# Altium PCB Pannel3.5x3.PcbDoc (part 3 of 4)
Units mil, origin at the board's own origin, x right, y up, seen from the top; angles counter-clockwise.
Board outline 3543.31 x 2771.65 mil, 4 copper layers (SIGNAL, GROUND, PWR, SIGNAL (Bottom)), stack 61.627 mil thick; 248 components, 189 nets, 921 pads, 651 vias.
Unrouted connection lines stored in the file: 1.
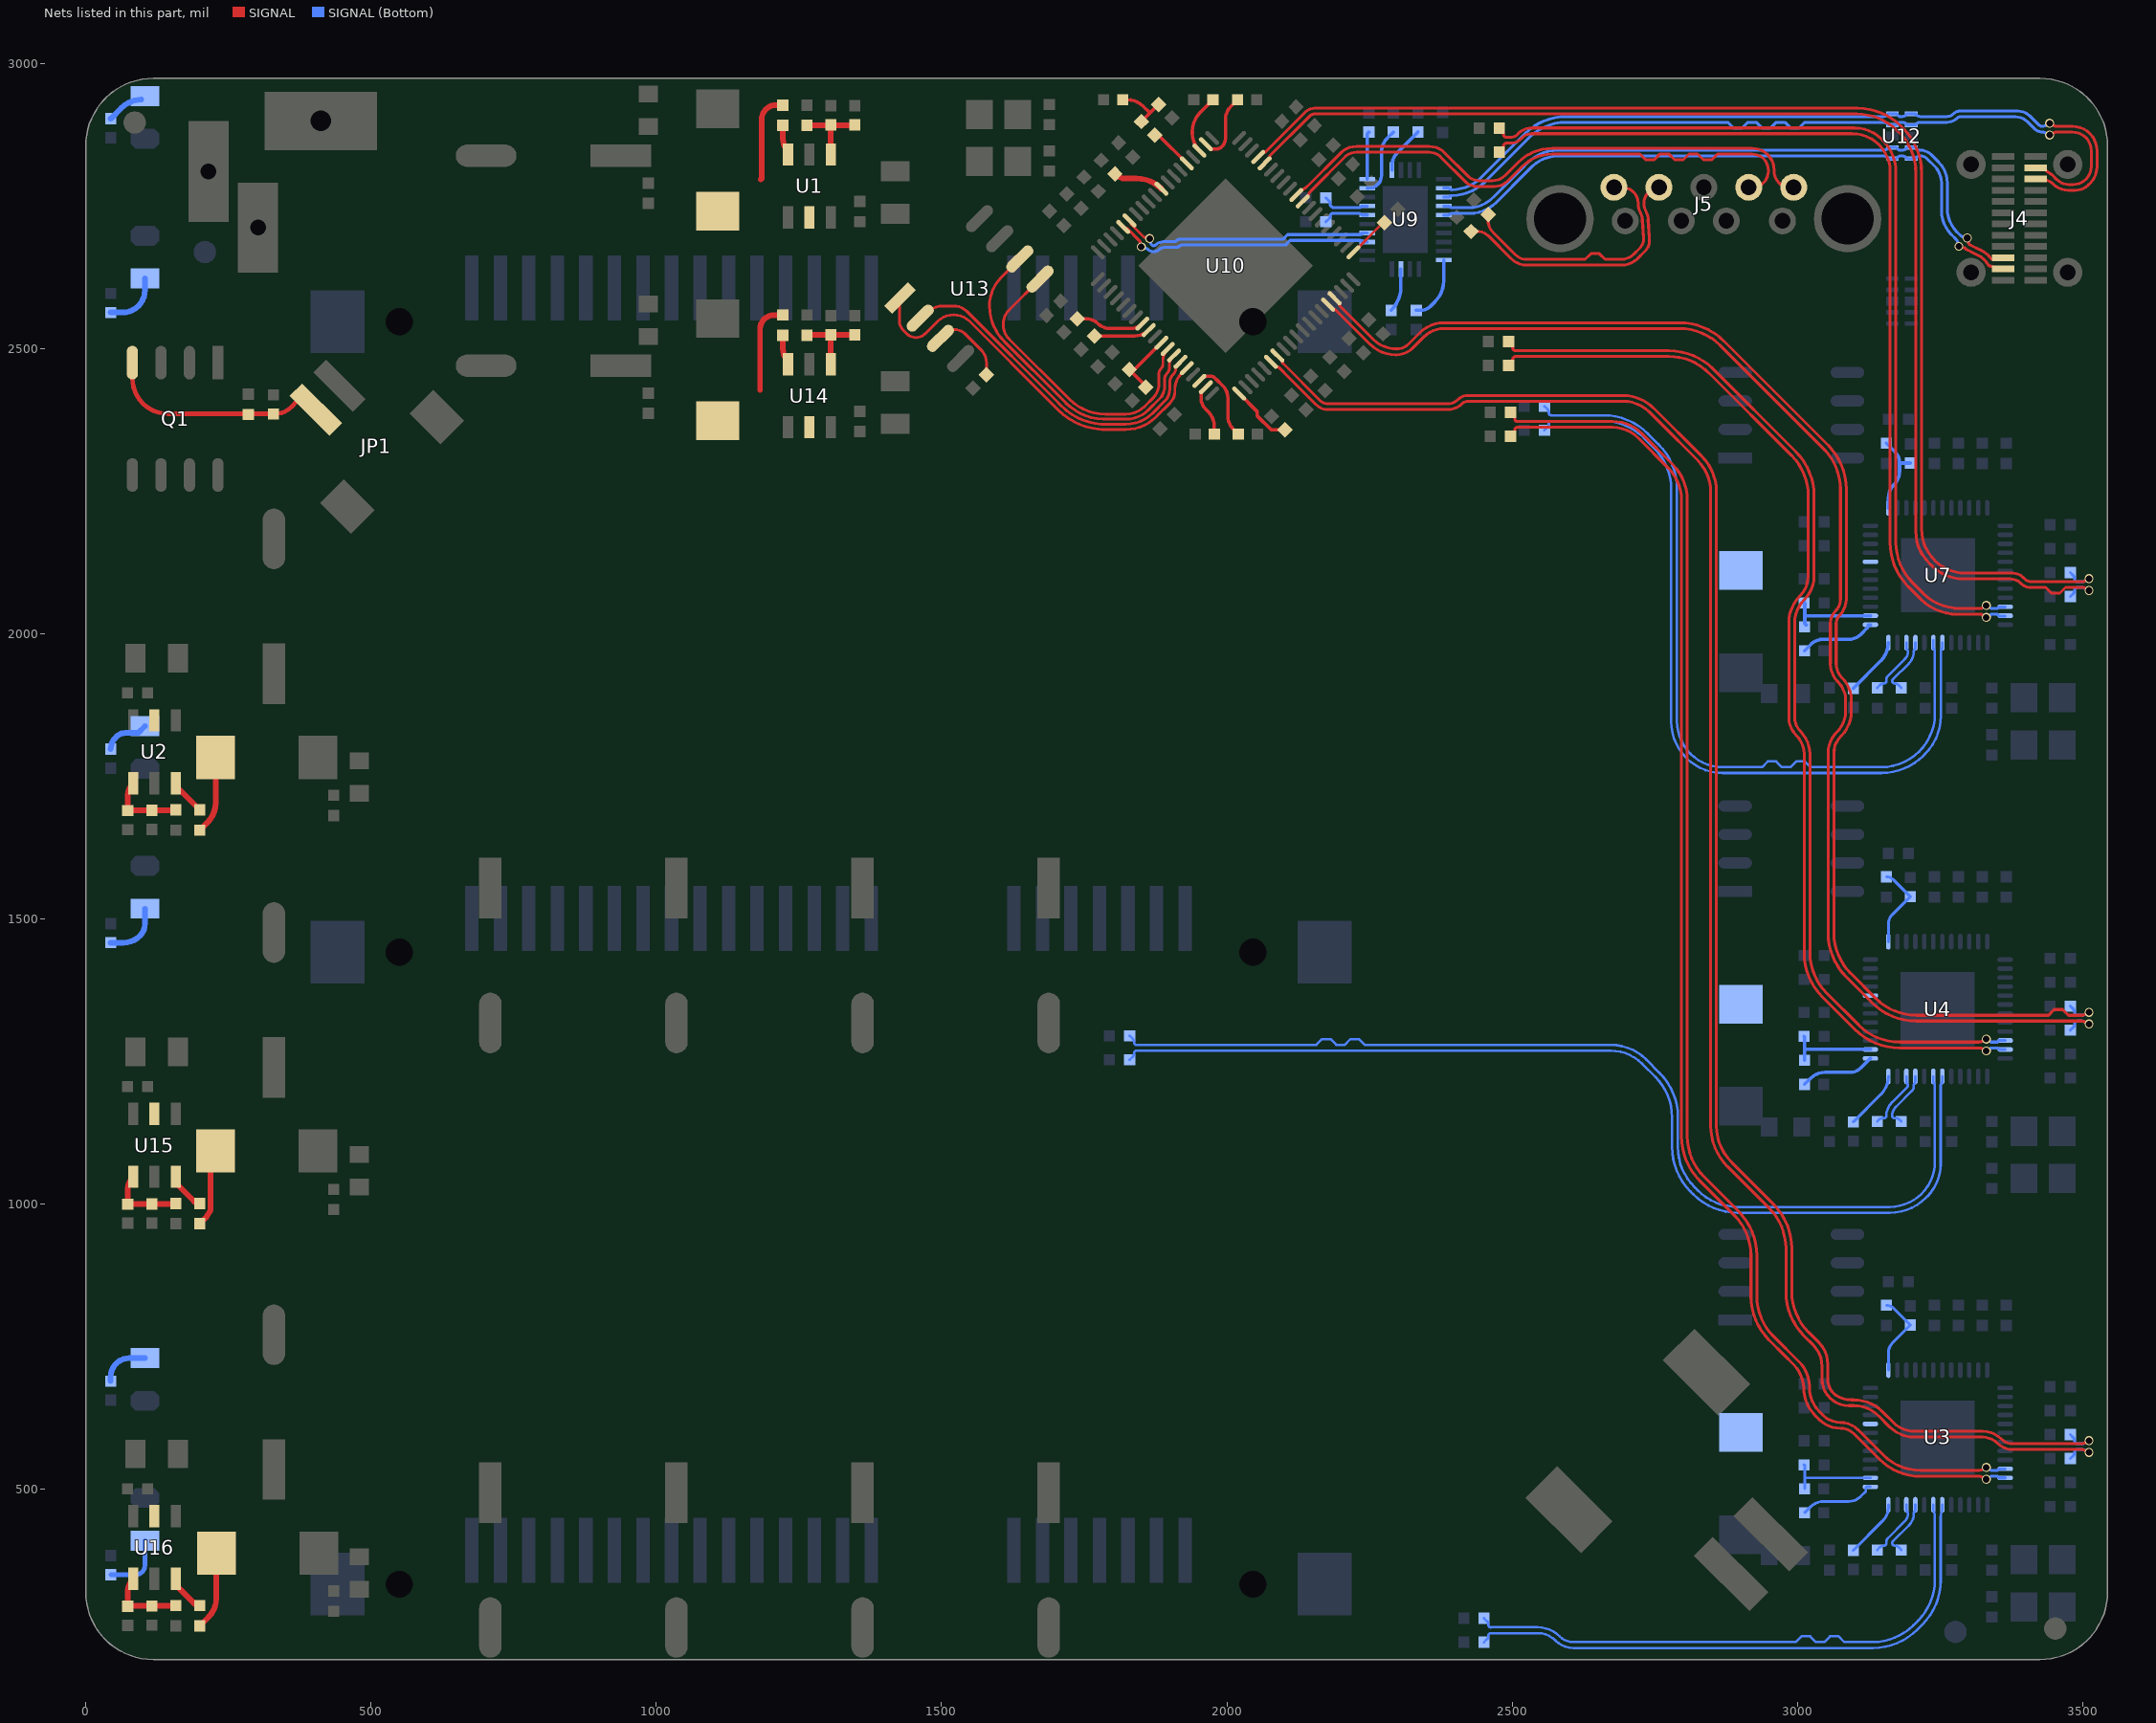
[diagram p5: the nets of this part, all layers, seen from the top]

## Via types
v1: diameter 15.75, hole 11.81, SIGNAL to SIGNAL (Bottom), tented both sides, 651 vias

## Nets (pads, with @x,y where several pads share a name; then routed paths per layer and width w, separated by ;. In a path a pad name is that pad's centre, name@x,y a point inside that pad or via, vN(x,y) a via of type N, cw(c..) or ccw(c..) an arc to the next point about the centre after c; other vN are vias at no path point) (continued)
IN_SSTX1_N: J4.A3 U9.2 U12.1 U12.10 | length 1402.5
  SIGNAL w5.1: J4.A3@3417.35,2796.9 ccw(c3420.44,2799.99) 3420.44,2795.62 3430.45,2795.62 cw(c3430.45,2770.67) 3448.09,2788.31 ccw(c3474.51,2814.73) 3474.51,2777.37 3487.85,2777.37 ccw(c3487.85,2808.7) 3509.62,2786.17 ccw(c3487.85,2808.7) 3510.01,2786.55 3513.03,2789.57 ccw(c3483.88,2818.71) 3525.1,2818.71 3525.1,2846.47 ccw(c3482.32,2846.47) 3512.57,2876.71 3512.39,2876.9 ccw(c3482.14,2846.65) 3482.14,2889.42 3453.97,2889.42 cw(c3453.97,2898.51) 3447.54,2892.09 3446.92,2892.71 ccw(c3442,2887.79) v1(3442,2894.75)
  SIGNAL (Bottom) w5.1: U9.2@2379.93,2781.11 2387.78,2781.11 cw(c2387.78,2776.3) U9.2@2391.17,2779.71 ; U9.2@2391.19,2779.69 ccw(c2394.59,2783.1) 2394.59,2778.29 ccw(c2394.59,2850) 2445.26,2799.26 ; 2445.29,2799.29 2522.53,2876.53 cw(c2595.08,2803.98) 2522.61,2876.61 cw(c2595.08,2803.98) 2595.08,2906.58 3150.78,2906.58 ccw(c3150.78,2916.78) 3157.99,2909.56 3157.99,2909.98 3158.68,2910.68 cw(c3160.36,2909) 3160.36,2911.37 U12.10@3166.56,2911.37 3171.79,2911.37 cw(c3171.79,2906.63) 3175.13,2909.99 3175.14,2909.57 3176.63,2908.07 ccw(c3180.24,2911.68) 3180.24,2906.58 3183.65,2906.58 ccw(c3183.65,2916.78) 3190.86,2909.56 3190.86,2909.98 3191.56,2910.68 cw(c3193.23,2909) 3193.23,2911.37 U12.1@3199.44,2911.37 3205.64,2911.37 cw(c3205.64,2909) 3207.32,2910.68 3208.01,2909.98 3208.01,2909.57 ccw(c3215.22,2916.78) 3215.22,2906.58 3261.98,2906.58 ccw(c3261.98,2922.83) 3273.48,2911.34 cw(c3284.97,2899.84) 3284.97,2916.1 3386.61,2916.1 cw(c3386.61,2886.59) 3407.48,2907.46 3422.59,2892.35 ccw(c3429.65,2899.42) 3428.17,2889.54 ccw(c3429.65,2899.42) 3429.65,2889.42 ccw(c3429.65,2899.42) 3436.72,2892.35 3437.08,2892.71 cw(c3442,2887.79) v1(3442,2894.75)
IN_SSTX1_P: J4.A2 U9.3 U12.2 U12.9 | length 1398.9
  SIGNAL w5.1: J4.A2@3417.35,2816.58 3423.51,2816.58 cw(c3423.51,2798.21) 3436.49,2811.22 3436.56,2811.15 ccw(c3440.14,2814.78) 3437.27,2810.56 3439.07,2809.36 3445.92,2804.77 3454.56,2796.12 ; v1(3442,2874) ccw(c3442,2880.96) 3446.92,2876.04 3447.54,2876.66 cw(c3453.97,2870.24) 3453.97,2879.32 3482.01,2879.32 cw(c3482.01,2846.34) 3505.32,2869.68 ; 3454.58,2796.1 ccw(c3475.44,2817) 3475.44,2787.47 3483.66,2787.47 ccw(c3483.66,2818.8) 3505.82,2796.65 ccw(c3483.66,2818.8) 3515,2818.8 3515,2846.34 ccw(c3482.01,2846.34) 3505.36,2869.64
  SIGNAL (Bottom) w5.1: U9.3@2379.93,2765.37 2387.78,2765.37 ccw(c2387.78,2770.18) U9.3@2391.17,2766.77 ; U9.3@2391.19,2766.79 cw(c2394.59,2763.38) 2394.59,2768.19 2394.68,2768.19 ccw(c2394.68,2849.77) 2452.37,2792.08 2529.64,2869.36 cw(c2595.11,2803.89) 2595.11,2896.48 2863,2896.48 2878,2896.48 2888,2886.48 2903,2886.48 2913,2896.48 2928,2896.48 2938,2886.48 2953,2886.48 2963,2896.48 2978,2896.48 2988,2886.48 3003,2886.48 3013,2896.48 3038,2896.48 3150.78,2896.48 cw(c3150.78,2886.28) 3157.99,2893.49 3157.99,2893.07 3158.68,2892.38 ccw(c3160.36,2894.05) 3160.36,2891.68 U12.9@3166.56,2891.68 3171.79,2891.68 ccw(c3171.79,2896.42) 3175.13,2893.07 3175.14,2893.49 3176.63,2894.98 cw(c3180.24,2891.38) 3180.24,2896.48 3183.65,2896.48 cw(c3183.65,2886.28) 3190.86,2893.49 3190.86,2893.07 3191.56,2892.38 ccw(c3193.23,2894.05) 3193.23,2891.68 U12.2@3199.44,2891.68 3205.64,2891.68 ccw(c3205.64,2894.05) 3207.32,2892.38 3208.01,2893.07 3208.01,2893.49 cw(c3215.22,2886.28) 3215.22,2896.48 3262.02,2896.48 ccw(c3262.02,2922.73) 3280.59,2904.17 cw(c3285.01,2899.75) 3285.01,2906 3382.43,2906 cw(c3382.43,2876.49) 3403.29,2897.36 3415.8,2884.85 ccw(c3429.15,2898.2) 3424.22,2879.98 ccw(c3429.15,2898.2) 3429.15,2879.32 cw(c3429.15,2868.1) v1@3437.07,2876.05 ; v1@3437.08,2876.04 ccw(c3442,2880.96) v1(3442,2874)
IN_SSTX2_N: J4.B2 U9.5 U12.5 U12.6 | length 1154.6
  SIGNAL w5.1: v1(3283,2679) 3291.7,2676.8 cw(c3290.46,2671.86) 3294.06,2675.47 ccw(c3304.81,2686.21) 3298.01,2672.62 3311.94,2665.65 3318.73,2662.26 cw(c3304.36,2633.51) 3327.06,2656.26 cw(c3304.36,2633.51) 3327.11,2656.21 cw(c3304.36,2633.51) 3330.81,2651.76 3334.47,2646.45 ; 3334.48,2646.45 ccw(c3338.7,2649.31) 3338.7,2644.21 cw(c3338.7,2636.03) J4.B2@3344.47,2641.83 ; J4.B2@3344.49,2641.8 ccw(c3350.26,2647.6) 3350.26,2639.42 J4.B2@3360.66,2639.42
  SIGNAL (Bottom) w5.1: U9.5@2379.93,2733.87 2387.78,2733.87 ccw(c2387.78,2738.69) 2391.19,2735.28 cw(c2394.6,2731.87) 2394.6,2736.7 2425.88,2736.7 ccw(c2425.88,2802.12) 2472.14,2755.86 2527.97,2811.69 2534.64,2818.36 cw(c2580.67,2772.33) 2580.67,2837.42 3150.78,2837.42 cw(c3150.78,2827.22) 3157.99,2834.44 3157.99,2834.02 3158.68,2833.32 ccw(c3160.36,2835) 3160.36,2832.63 U12.6@3166.56,2832.63 3171.79,2832.63 ccw(c3171.79,2837.37) 3175.13,2834.01 3175.14,2834.43 3176.63,2835.93 cw(c3180.24,2832.32) 3180.24,2837.42 3183.65,2837.42 cw(c3183.65,2827.22) 3190.86,2834.44 3190.86,2834.02 3191.56,2833.32 ccw(c3193.23,2835) 3193.23,2832.63 U12.5@3199.44,2832.63 3205.64,2832.63 ccw(c3205.64,2835) 3207.32,2833.32 3208.01,2834.02 3208.01,2834.43 cw(c3215.22,2827.22) 3215.22,2837.42 cw(c3215.22,2819.66) 3227.78,2832.22 3240.22,2819.78 ; 3240.25,2819.75 cw(c3210.63,2790.19) 3252.48,2790.19 3252.48,2742.29 ccw(c3313.39,2742.29) 3270.22,2699.31 ccw(c3313.39,2742.29) 3270.32,2699.21 3278.3,2691.23 ; 3278.31,2691.22 cw(c3271.87,2684.8) 3280.96,2684.8 3280.96,2683.92 ccw(c3287.92,2683.92) v1(3283,2679)
IN_SSTX2_P: J4.B3 U9.4 U12.4 U12.7 | length 1151.3
  SIGNAL w5.1: v1(3297.67,2693.67) 3299.87,2684.97 ccw(c3304.81,2686.21) 3301.2,2682.61 ccw(c3304.81,2686.21) 3302.53,2681.65 3307.11,2679.36 3314.33,2675.75 3323.25,2671.29 cw(c3304.36,2633.51) 3334.17,2663.43 cw(c3304.36,2633.51) 3334.27,2663.33 cw(c3304.36,2633.51) 3338.31,2658.64 ccw(c3342.43,2661.64) 3342.43,2656.54 3343.52,2656.54 3344.48,2656.7 cw(c3350.26,2650.92) 3350.26,2659.1 J4.B3@3360.66,2659.1
  SIGNAL (Bottom) w5.1: U9.4@2379.93,2749.62 2387.78,2749.62 cw(c2387.78,2744.8) 2391.19,2748.21 ccw(c2394.6,2751.62) 2394.6,2746.8 2423.79,2746.8 ccw(c2423.79,2807.17) 2466.45,2764.45 ; 2466.48,2764.48 2517.87,2815.87 2527.59,2825.59 cw(c2580.54,2772.65) 2527.66,2825.66 cw(c2580.54,2772.65) 2580.54,2847.52 3150.78,2847.52 ccw(c3150.78,2857.72) 3157.99,2850.51 3157.99,2850.93 3158.68,2851.62 cw(c3160.36,2849.95) 3160.36,2852.32 U12.7@3166.56,2852.32 3171.79,2852.32 cw(c3171.79,2847.58) 3175.13,2850.93 3175.14,2850.51 3176.63,2849.02 ccw(c3180.24,2852.62) 3180.24,2847.52 3183.65,2847.52 ccw(c3183.65,2857.72) 3190.86,2850.51 3190.86,2850.93 3191.56,2851.62 cw(c3193.23,2849.95) 3193.23,2852.32 U12.4@3199.44,2852.32 3205.64,2852.32 cw(c3205.64,2849.95) 3207.32,2851.62 3208.01,2850.93 3208.01,2850.51 ccw(c3215.22,2857.72) 3215.22,2847.52 3215.3,2847.52 cw(c3215.3,2819.85) 3234.87,2839.42 3247.46,2826.82 cw(c3210.98,2790.34) 3262.58,2790.34 3262.58,2746.47 ccw(c3323.49,2746.47) 3280.33,2703.49 ccw(c3323.49,2746.47) 3280.42,2703.39 3285.44,2698.37 ccw(c3291.87,2704.8) 3291.87,2695.71 3292.75,2695.71 cw(c3292.75,2688.75) v1(3297.67,2693.67)
LXO-A: L4.1 U3.44
LXO-B: L5.1 U4.44
LXO-C: L6.1 U7.44
NetC3_1: C3.1 U1.6 | length 48
  SIGNAL w10: C3.1@1222,2891 1222,2867.14 ccw(c1252.73,2867.14) 1223.2,2858.62 ccw(c1252.73,2867.14) U1.6@1231,2845.41
NetC3_2: C3.2 L1.1 U1.2 | length 157.7
  SIGNAL w10: 1183,2796 1185,2798 1185,2901.79 cw(c1209.64,2901.79) 1192.22,2919.22 cw(c1209.64,2901.79) 1209.64,2926.43 C3.2@1222,2926.43
NetC4_1: C4.1 U2.6 | length 63.8
  SIGNAL w10: U2.6@158,1738 ccw(c169.8,1738) 161.46,1729.66 C4.1@200,1691.11
NetC4_2: C4.2 L2.1 U2.2 | length 136.9
  SIGNAL w10: C4.2@200,1655.68 214,1669.68 ccw(c180.2,1703.48) 228,1703.48 L2.1@228,1783
NetC9_1: C9.1 R1.2 R3.1 U1.4 | length 136.5
  SIGNAL w10: C9.1@1264,2891 1264.5,2891.5 R1.2@1305.9,2891.5 ; U1.4@1305.8,2840 1305.9,2840.1 R1.2@1305.9,2891.5 ; R1.2@1306,2892 1305.9,2891.9 R1.2@1305.9,2891.5 ; R3.1@1348,2892 1347.5,2891.5 R1.2@1305.9,2891.5
NetC10_1: C10.1 R2.2 R4.1 U2.4 | length 134.9
  SIGNAL w10: U2.4@83.2,1738 ccw(c105.4,1715.8) 74.08,1718.06 ccw(c105.4,1715.8) 74,1715.8 R4.1@74,1690 74.56,1690.56 157.44,1690.56 C10.1@158,1691.11
NetC17_1: C17.1 U14.6 | length 48
  SIGNAL w10: C17.1@1222,2523 1222,2499.14 ccw(c1252.73,2499.14) 1223.2,2490.62 ccw(c1252.73,2499.14) U14.6@1231,2477.41
NetC17_2: C17.2 L3.1 U14.2 | length 160.9
  SIGNAL w10: 1182,2427 1182,2533.79 cw(c1206.64,2533.79) 1189.22,2551.22 cw(c1206.64,2533.79) 1206.64,2558.43 C17.2@1222,2558.43
NetC30_2: C30.2 R26.2 U3.38 | length 158.3
  SIGNAL (Bottom) w5: C30.2@3011.57,543 3012.55,542.02 3012.55,521.51 ; R26.2@3012.55,501 3012.55,521.51 ; U3.38@3127.89,520.13 3013.93,520.13 3012.55,521.51
NetC31_2: C31.2 R27.2 U4.38 | length 157.7
  SIGNAL (Bottom) w6: C31.2@3011.57,1294 3012.55,1293.02 3012.55,1271.13 ; R27.2@3012.55,1252 3012.55,1271.13 ; U4.38@3127.89,1271.13 3012.55,1271.13
NetC36_1: C36.1 R30.2 U3.1 | length 149.5
  SIGNAL (Bottom) w5: C36.1@3156,822.72 cw(c3156,804.85) 3168.63,817.48 R30.2@3198,788.14 3166.83,756.97 ; U3.1@3159.39,709.11 3159.39,739 cw(c3184.8,739) 3166.82,756.96
NetC37_1: C37.1 R31.2 U4.1 | length 149.6
  SIGNAL (Bottom) w5: C37.1@3156,1573.72 cw(c3156,1555.79) 3168.67,1568.47 R31.2@3198,1539.14 3166.12,1507.26 ccw(c3182.38,1491) 3159.39,1491 U4.1@3159.39,1460.11
NetC74_2: C74.2 R34.2 U7.38 | length 159.6
  SIGNAL (Bottom) w6: C74.2@3011.57,2058.18 C74.2@3011.57,2054 3013,2052.57 3013,2031.13 ; R34.2@3012.71,2017.71 R34.2@3015.48,2014.93 ; R34.2@3013,2018 3013,2031.13 ; U7.38@3127.89,2031.13 3013,2031.13
NetC77_1: C77.1 R36.2 U7.1 | length 146.2
  SIGNAL (Bottom) w6: C77.1@3156,2333.72 3170.82,2318.9 cw(c3151.06,2299.14) 3179,2299.22 cw(c3151.06,2299.14) 3179,2299.14 ; U7.1@3159.39,2220.11 3159.39,2237.52 cw(c3192.87,2237.52) 3169.17,2261.17 ; 3169.19,2261.19 ccw(c3145.52,2284.87) 3179,2284.87 3179,2299.14 ; R36.2@3198,2299.14 3179,2299.14
NetC97_1: C97.1 R40.1 U10.68 | length 113
  SIGNAL w6: C97.1@1831.5,2460.5 1858,2434 R40.1@1858,2432 ; C97.1@1832,2461 1836.2,2461 U10.68@1885.22,2510.01
NetC127_2: C127.2 JP1.1 Q1.4 R11.2 | length 398.4
  SIGNAL w8: Q1.4@82,2475 82,2447.97 ccw(c144.71,2447.97) 100.34,2403.66 ccw(c144.71,2447.97) 144.71,2385.27 R11.2@329,2385.27 332.21,2385.27 ccw(c332.21,2424.46) 359.9,2396.73 ; 359.93,2396.75 371.4,2408.22 388.02,2408.22 JP1.1@403.37,2392.87
NetC128_1: C128.1 U15.6 | length 67.1
  SIGNAL w10: U15.6@158,1048 158,1037.17 189.86,1005.31 ccw(c200,1015.45) C128.1@200,1001.11
NetC128_2: C128.2 L7.1 U15.2 | length 137.8
  SIGNAL w10: C128.2@200,965.68 208.6,974.28 ccw(c183.89,999) 213.15,979.87 217.38,986.35 ccw(c209.84,991.27) 218.84,991.27 218.84,1083.84 L7.1@228,1093
NetC133_1: C133.1 R5.2 R7.1 U14.4 | length 136.5
  SIGNAL w10: C133.1@1264,2523 1264.5,2523.5 R5.2@1305.9,2523.5 ; U14.4@1305.8,2472 1305.9,2472.1 R5.2@1305.9,2523.5 ; R5.2@1306,2524 1305.9,2523.9 R5.2@1305.9,2523.5 ; R7.1@1348,2524 1347.5,2523.5 R5.2@1305.9,2523.5
NetC134_1: C134.1 R6.2 R9.1 U15.4 | length 134.9
  SIGNAL w10: U15.4@83.2,1048 ccw(c105.4,1025.8) 74.08,1028.06 ccw(c105.4,1025.8) 74,1025.8 R9.1@74,1000 74.56,1000.56 157.44,1000.56 C134.1@158,1001.11
NetC140_1: C140.1 U16.6 | length 67.1
  SIGNAL w10: U16.6@158,343 158,332.17 189.86,300.31 ccw(c200,310.45) C140.1@200,296.11
NetC140_2: C140.2 L8.1 U16.2 | length 137.4
  SIGNAL w10: C140.2@200,260.68 215.52,276.2 ccw(c182.72,309) 229.11,309 L8.1@229.11,388
NetC143_1: C143.1 R10.2 R12.1 U16.4 | length 134.9
  SIGNAL w10: U16.4@83.2,343 ccw(c105.4,320.8) 74.08,323.06 ccw(c105.4,320.8) 74,320.8 R12.1@74,295 74.56,295.56 157.44,295.56 C143.1@158,296.11
NetLED3_1: LED3.1 R20.2 | length 86.3
  SIGNAL (Bottom) w10: R20.2@44,689.73 44,697.6 cw(c76.36,697.6) 53.48,720.48 cw(c76.36,697.6) 76.36,729.96 LED3.1@104.01,729.96
NetLED4_1: LED4.1 R21.2 | length 112.6
  SIGNAL (Bottom) w8: R21.2@44,350.27 87.3,350.27 ccw(c87.3,366.97) 99.11,355.16 ccw(c87.3,366.97) 104,366.97 LED4.1@104,410.05
NetLED5_1: LED5.1 R22.2 | length 81.2
  SIGNAL (Bottom) w10: R22.2@44,1797.73 cw(c71.2,1797.73) 48.84,1813.22 cw(c71.2,1797.73) 51.97,1816.97 54.91,1819.91 cw(c69.56,1805.26) 69.56,1825.98 92.05,1825.98 LED5.1@104.01,1837.94
NetLED6_1: LED6.1 R23.2 | length 104.6
  SIGNAL (Bottom) w10: R23.2@44,1458.27 66.41,1458.27 ccw(c66.41,1498.97) 95.19,1470.19 ccw(c73.92,1491.46) 104,1491.46 LED6.1@104,1518.03
NetLED7_1: LED7.1 R24.2 | length 65.5
  SIGNAL (Bottom) w10: R24.2@44,2902.73 63.04,2921.78 cw(c97.76,2887.07) 73.79,2929.9 cw(c97.76,2887.07) LED7.1@97.76,2936.15
NetLED8_1: LED8.1 R25.2 | length 102.6
  SIGNAL (Bottom) w10: R25.2@44,2563 64.74,2563 ccw(c64.74,2602.26) 92.5,2574.5 ; 92.53,2574.53 ccw(c64.74,2602.26) 104,2602.26 LED8.1@104,2622.5
NetR8_1: R8.1 U13.3 | length 137.4
  SIGNAL w5: U13.3@1498.08,2517.73 1513.36,2533 1523.56,2533 cw(c1523.56,2508.37) 1540.97,2525.79 1569.38,2497.38 cw(c1546.56,2474.56) 1578.83,2474.56 R8.1@1578.83,2453.83
NetR28_2: R28.2 U3.37 | length 135.3
  SIGNAL (Bottom) w5: R28.2@3012.55,459 3022.55,469 cw(c3046.69,444.86) 3046.69,479 3090.22,479 ccw(c3090.22,508.67) 3111.19,487.69 3119.88,496.38 3119.88,503.06 3121.21,504.39 U3.37@3127.89,504.39
NetR29_2: R29.2 U4.37 | length 131.4
  SIGNAL (Bottom) w6: R29.2@3012.55,1210 3023.05,1220.5 cw(c3048.4,1195.15) 3023.34,1220.78 cw(c3048.4,1195.15) 3048.4,1231 3091.97,1231 ccw(c3091.97,1258.85) 3111.65,1239.14 U4.37@3127.89,1255.39
NetR32_2: R32.2 U3.36 | length 103.7
  SIGNAL (Bottom) w5: R32.2@3098,393.14 3149.43,444.57 ccw(c3125.39,468.61) 3159.39,468.61 U3.36@3159.39,472.89
NetR33_2: R33.2 U4.36 | length 103.3
  SIGNAL (Bottom) w5: R33.2@3098,1144.14 3146.4,1192.55 ccw(c3115.06,1223.89) U4.36@3159.39,1223.89
NetR35_2: R35.2 U7.37 | length 133.4
  SIGNAL (Bottom) w6: R35.2@3012.55,1970 3024.46,1981.9 cw(c3044,1962.36) 3044,1990 3090.26,1990 ccw(c3090.26,2019.56) 3111.14,1998.64 3121.74,2009.24 ccw(c3115.59,2015.39) 3124.29,2015.39 U7.37@3127.89,2015.39
NetR37_2: R37.2 U7.36 | length 103.3
  SIGNAL (Bottom) w6: R37.2@3098,1904.14 3146.04,1952.19 ccw(c3114.7,1983.53) 3159.03,1983.53 U7.36@3159.39,1983.89
NetR38_2: R38.2 U9.24 | length 83.6
  SIGNAL (Bottom) w6: U9.24@2246.07,2796.87 2246.07,2876.34 R38.2@2249,2879.27
NetR39_2: R39.2 U9.23 | length 120.9
  SIGNAL (Bottom) w6: U9.23@2246.07,2781.12 2248.08,2781.12 2256.85,2782.06 2261.59,2785.33 ccw(c2248.08,2804.91) 2264.64,2787.82 2264.71,2787.89 ccw(c2259.85,2792.93) 2264.78,2787.96 ; 2264.8,2787.99 2264.9,2788.09 ccw(c2250.34,2802.65) 2270.94,2802.65 2270.94,2843.31 cw(c2306.89,2843.31) 2281.47,2868.74 R39.2@2292,2879.27
NetR41_1: R41.1 U10.66 | length 97.7
  SIGNAL w6: R41.1@1768,2522 1838.35,2522 ccw(c1838.35,2556.88) U10.66@1863.01,2532.22
NetR42_1: R42.1 U10.65 | length 120.6
  SIGNAL w6: R42.1@1738,2552 1753.75,2552 cw(c1753.75,2523) 1753.83,2552 cw(c1753.75,2523) 1756.89,2551.83 cw(c1753.75,2523) 1768.85,2547.76 cw(c1753.75,2523) 1774.24,2543.53 ; 1774.26,2543.51 ccw(c1794.72,2563.99) 1794.72,2535.04 1831.68,2535.04 ccw(c1831.68,2563.55) U10.65@1851.84,2543.39
NetR43_1: R43.1 U10.75 | length 92.3
  SIGNAL w6: U10.75@1963.21,2432.02 1955,2423.81 1955,2412.57 ccw(c1982.13,2412.57) 1962.95,2393.39 1967.98,2388.35 cw(c1943.8,2364.17) 1978,2364.17 R43.1@1978,2350
NetR44_1: R44.1 U10.74 | length 143.3
  SIGNAL w6: U10.74@1952.04,2443.19 1955.01,2446.17 cw(c1967.99,2433.19) 1967.99,2451.54 1972.22,2451.29 cw(c1971.56,2440.37) 1979.3,2448.1 1981.42,2445.98 1993.6,2433.8 1993.6,2433.54 cw(c1973.81,2413.74) 2001.8,2413.74 2001.8,2381.53 ccw(c2033.33,2381.53) R44.1@2011.01,2359.26 ; R44.1@2011.03,2359.23 R44.1@2020.27,2350
NetR45_1: R45.1 U9.25 | length 84.3
  SIGNAL (Bottom) w6: U9.25@2289.38,2812.62 2289.38,2819.96 cw(c2323.04,2819.96) 2299.24,2843.76 R45.1@2335,2879.52
NetR46_2: R46.2 U9.13 | length 77.2
  SIGNAL (Bottom) w6: R46.2@2288.03,2566.76 ccw(c2246.67,2608.06) 2305.12,2608.06 U9.13@2305.12,2639.38
NetR47_2: R47.2 U9.10 | length 115.3
  SIGNAL (Bottom) w6: R47.2@2332,2566.73 2339.06,2566.73 ccw(c2339.06,2592.51) 2357.27,2574.27 ; 2357.28,2574.28 2364.83,2581.83 ccw(c2328.38,2618.28) 2379.93,2618.28 U9.10@2379.93,2655.13
NetR48_1: R48.1 U10.1 | length 110.9
  SIGNAL w6: U10.1@2021.69,2420.92 2052.95,2389.65 2052.95,2382.23 2078.01,2357.17 R48.1@2101.83,2357.17
NetR49_1: R49.1 U10.47 | length 88.6
  SIGNAL w10: R49.1@1803.83,2806.17 ccw(c1825.97,2828.3) 1817.04,2798.3 ccw(c1825.97,2828.3) 1818.12,2798 1841.73,2798 cw(c1841.73,2736.5) 1884.83,2780.37 cw(c1841.73,2736.5) U10.47@1885.22,2779.99
NetR50_1: R50.1 R51.2 R53.1 | length 97.8
  SIGNAL w6: R50.1@1817.73,2936 1825.62,2936 cw(c1825.62,2896.45) 1853.58,2924.42 1865.17,2912.83 ; R51.2@1850.17,2897.83 1865.17,2912.83 ; R53.1@1880.17,2927.83 1865.17,2912.83
NetR51_1: R51.1 U10.43 | length 76.5
  SIGNAL w6: R51.1@1873.83,2874.17 1880.13,2874.17 U10.43@1929.76,2824.53
NetR52_1: R52.1 U10.41 | length 105.4
  SIGNAL w6: U10.41@1952.04,2846.81 1952.04,2847.12 cw(c1982.19,2877.27) 1939.55,2877.27 1939.55,2879.71 cw(c1988.08,2879.71) 1953.76,2914.03 1968.89,2929.16 R52.1@1975.73,2936
NetR54_1: R54.1 U10.40 | length 124.2
  SIGNAL w6: U10.40@1963.21,2857.98 1971.56,2849.63 1979.59,2849.63 ccw(c1979.59,2855.63) 1979.9,2849.64 1983.23,2849.81 ccw(c1982.66,2860.73) 1990.36,2852.96 ; 1990.4,2853 1992.29,2854.89 ccw(c1979.59,2867.58) 1997.54,2867.58 1997.54,2901 cw(c2030.24,2901) 2007.11,2924.11 R54.1@2019,2936
NetR55_1: R55.1 U10.20 | length 75.1
  SIGNAL w5.1: U10.20@2222.08,2668.69 2271.72,2718.33 cw(c2276.17,2713.88) R55.1@2276.17,2720.17
RX1_N: C26.2 U3.31 | length 1016
  SIGNAL (Bottom) w4.29: C26.2@2450.72,274 2456.42,268.3 cw(c2451.6,263.48) 2458.41,263.48 2458.41,262.43 ccw(c2462.7,262.43) 2458.63,261.08 ccw(c2462.7,262.43) 2459.67,259.4 ccw(c2462.7,262.44) 2462.7,258.14 2544.93,258.14 cw(c2544.93,203.89) 2583.29,242.26 ccw(c2607.39,266.34) 2607.39,232.28 2981,232.28 2997.14,232.28 3007.14,242.28 3022.14,242.28 3032.14,232.28 3047.14,232.28 3057.14,242.28 3072.14,242.28 3082.14,232.28 3097.14,232.28 3132.3,232.28 ccw(c3132.3,332.28) 3203.01,261.57 3211.57,270.12 ccw(c3140.86,340.83) 3240.86,340.83 3240.86,423.93 3240.86,452.03 ccw(c3217.26,452.03) 3238.14,463.03 U3.31@3238.13,472.89
RX1_P: C29.2 U3.30 | length 1015.6
  SIGNAL (Bottom) w4.29: C29.2@2450.72,232 2456.42,237.7 ccw(c2451.6,242.52) 2458.41,242.52 2458.41,243.56 cw(c2462.7,243.56) 2458.63,244.92 cw(c2462.7,243.56) 2459.67,246.6 cw(c2462.7,243.56) 2461.35,247.63 cw(c2462.7,243.56) 2462.7,247.85 2499.85,247.85 2544.85,247.85 cw(c2544.85,203.69) 2576.05,234.95 ; 2576.09,234.91 ccw(c2607.31,266.15) 2607.31,221.99 3132.35,221.99 ccw(c3132.35,332.17) 3210.26,254.26 3218.87,262.87 ccw(c3140.95,340.79) 3218.97,262.97 ccw(c3140.95,340.79) 3251.15,340.79 3251.15,423.93 3251.15,452.03 cw(c3274.74,452.03) 3253.87,463.05 U3.30@3253.87,472.89
RX2_N: C25.2 U4.31 | length 1814.7
  SIGNAL (Bottom) w4.29: C25.2@1829.72,1295 1835.42,1289.3 cw(c1830.6,1284.48) 1837.41,1284.48 1837.41,1283.44 ccw(c1841.7,1283.44) 1838.67,1280.4 ccw(c1841.7,1283.44) 1841.7,1279.15 2141.75,1279.14 2156.75,1279.14 2166.75,1289.14 2181.75,1289.14 2191.75,1279.14 2206.75,1279.14 2216.75,1289.14 2231.75,1289.14 2241.75,1279.14 2292,1279.14 2672.93,1279.14 cw(c2672.93,1191.09) 2735.2,1253.35 2758.25,1230.3 cw(c2680.34,1152.4) 2790.52,1152.4 2790.52,1100.24 ccw(c2890.52,1100.24) 2819.81,1029.53 2825.05,1024.29 ccw(c2895.76,1095) 2895.76,995 3161.84,995 ccw(c3161.84,1074.01) 3217.71,1018.14 ; 3217.74,1018.17 ccw(c3161.84,1074.01) 3240.86,1074.01 3240.86,1208.42 ccw(c3236.2,1208.42) 3239.49,1211.71 cw(c3242.78,1215.01) 3238.13,1215.01 U4.31@3238.13,1223.89
RX2_P: C28.2 U4.30 | length 1814.8
  SIGNAL (Bottom) w4.29: C28.2@1829.72,1253 1835.42,1258.7 ccw(c1830.6,1263.52) 1837.41,1263.52 1837.41,1264.56 cw(c1841.7,1264.56) 1838.67,1267.6 cw(c1841.7,1264.56) 1841.7,1268.85 2672.76,1268.86 cw(c2672.76,1190.68) 2728.04,1245.96 2750.94,1223.06 cw(c2680.23,1152.35) 2780.23,1152.35 2780.23,1100.2 ccw(c2890.41,1100.2) 2812.46,1022.33 ccw(c2890.41,1100.2) 2812.5,1022.29 2817.8,1016.99 ccw(c2895.73,1094.93) 2817.92,1016.87 ccw(c2895.73,1094.93) 2895.58,984.71 ccw(c2895.73,1094.93) 2895.73,984.71 3161.89,984.71 ccw(c3161.89,1073.91) 3224.96,1010.83 3228,1013.88 ; 3228.03,1013.91 ccw(c3172.13,1069.75) 3251.15,1069.75 3251.15,1208.42 cw(c3255.8,1208.42) 3252.5,1211.7 ccw(c3249.22,1215.01) 3253.87,1215.01 U4.30@3253.87,1223.89
RX3_N: C24.2 U7.31 | length 1417.3
  SIGNAL (Bottom) w4.29: C24.2@2556.59,2398.73 C24.2@2562.29,2393.03 ; C24.2@2562.29,2393.02 cw(c2557.47,2388.21) 2564.29,2388.21 2564.29,2387.16 ccw(c2568.58,2387.16) 2565.54,2384.13 ccw(c2568.58,2387.17) 2568.58,2382.87 2660.04,2382.87 cw(c2660.04,2272.7) 2737.93,2350.62 2756.73,2331.82 cw(c2678.82,2253.91) 2789,2253.91 2789,1846.23 ccw(c2869.23,1846.23) 2812.48,1789.52 ccw(c2869.23,1846.23) 2869.23,1766 2923,1766 2938,1766 2948,1776 2963,1776 2973,1766 2988,1766 2998,1776 3013,1776 3023,1766 3077,1766 3147.13,1766 ccw(c3147.13,1859.83) 3213.48,1793.48 ccw(c3147.13,1859.83) 3240.97,1859.83 3240.97,1968.8 ccw(c3236.31,1968.8) 3239.6,1972.09 cw(c3242.89,1975.38) 3238.24,1975.38 U7.31@3238.24,1984.27 U7.31@3238.24,1988.53
RX3_P: C27.2 U7.30 | length 1413.1
  SIGNAL (Bottom) w4.29: C27.2@2556.59,2356.73 2562.29,2362.43 ccw(c2557.47,2367.25) 2564.29,2367.25 2564.29,2368.29 cw(c2568.58,2368.29) 2565.54,2371.33 cw(c2568.58,2368.29) 2568.58,2372.58 2659.99,2372.58 cw(c2659.99,2272.58) 2730.7,2343.3 2749.42,2324.58 cw(c2678.71,2253.87) 2778.71,2253.87 2778.71,1846.16 ccw(c2869.06,1846.16) 2805.13,1782.32 ccw(c2869.06,1846.16) 2805.17,1782.27 2805.27,1782.17 ccw(c2869.16,1846.06) 2805.38,1782.07 ccw(c2869.16,1846.06) 2869.03,1755.71 ccw(c2869.16,1846.06) 2869.16,1755.71 3147.28,1755.71 ccw(c3147.28,1859.49) 3220.66,1786.11 3223.77,1789.22 ccw(c3157.42,1855.57) 3251.26,1855.57 3251.26,1968.8 cw(c3255.91,1968.8) U7.30@3252.62,1972.09 ; U7.30@3252.63,1972.1 ccw(c3249.33,1975.39) 3253.98,1975.39 U7.30@3253.98,1984.27
SPICLK: U10.70 U13.6 | length 590.5
  SIGNAL w5: 1609.55,2512.72 1712.64,2409.64 1717.69,2404.58 ccw(c1786.65,2473.49) 1717.75,2404.53 ccw(c1786.65,2473.49) 1782.96,2376.07 1784.78,2376 1823.31,2376 ccw(c1823.31,2432.1) 1862.95,2392.41 ccw(c1823.31,2432.1) 1863,2392.46 1881.83,2411.28 ccw(c1859.68,2433.43) 1891,2433.43 1891,2446.4 cw(c1904.9,2446.4) 1895.06,2456.22 ; 1609.54,2512.74 cw(c1671.23,2574.4) 1584,2574.4 cw(c1654.6,2574.4) 1604.68,2624.32 U13.6@1637.27,2656.92 ; 1895.07,2456.23 ccw(c1885.24,2466.05) 1899.14,2466.05 1899.14,2469.84 cw(c1922.18,2469.84) 1905.88,2486.13 U10.70@1907.49,2487.74
SPICS: U10.72 U13.1 | length 707.2
  SIGNAL w5: U13.1@1427.37,2588.44 ccw(c1429.88,2585.93) 1426.33,2585.93 1426.33,2547.63 ccw(c1448.32,2547.63) 1432.77,2532.08 1439.21,2525.64 ccw(c1455.25,2541.69) 1455.25,2519 ccw(c1455.25,2541.69) 1471.29,2525.64 1492.92,2547.27 cw(c1521.23,2518.96) 1521.23,2559 cw(c1521.23,2518.96) 1549.53,2547.29 ; 1549.54,2547.27 1691.91,2404.91 1704.95,2391.86 ccw(c1786.65,2473.49) 1705.06,2391.76 ccw(c1786.65,2473.49) 1775.52,2358.54 1781.06,2358 1823.31,2358 ccw(c1823.31,2432.1) 1875.65,2379.65 ccw(c1823.31,2432.1) 1875.71,2379.71 1877.25,2381.25 1900.5,2404.5 ccw(c1879.98,2425.02) 1909,2425.02 1909,2428.85 cw(c1947.27,2428.85) 1920.21,2455.91 U10.72@1929.76,2465.47
SPISI: U10.69 U13.5 | length 538.3
  SIGNAL w5: U13.5@1672.63,2621.56 1618.58,2567.52 ccw(c1644.13,2541.97) 1608,2541.97 ccw(c1644.13,2541.97) 1618.58,2516.42 1724.08,2410.92 ccw(c1786.65,2473.49) 1786.65,2385 1823.31,2385 ccw(c1823.31,2432.1) 1856.61,2398.8 1870.41,2412.59 ccw(c1844.84,2438.16) 1881,2438.16 1881,2455.86 cw(c1893.01,2455.86) 1884.52,2464.36 ccw(c1876.02,2472.85) 1888.04,2472.85 1888.04,2479.18 cw(c1915.34,2479.18) 1896.03,2498.48 U10.69@1896.39,2498.84
SPISO: U10.71 U13.2 | length 606.9
  SIGNAL w5: U13.2@1462.73,2553.08 1465.65,2553.08 U13.2@1476.28,2563.71 ; U13.2@1476.3,2563.73 cw(c1501.95,2538.04) 1501.95,2574.34 1521.66,2574.34 cw(c1521.66,2541.66) 1543.16,2566.27 1543.68,2565.83 cw(c1537.82,2559) 1544.17,2565.38 ; 1544.19,2565.35 1550.77,2558.77 1697.27,2412.27 1711.32,2398.23 ccw(c1786.65,2473.49) 1711.4,2398.14 ccw(c1786.65,2473.49) 1779.23,2367.26 1782.92,2367 1823.31,2367 ccw(c1823.31,2432.1) 1869.3,2386.03 ccw(c1823.31,2432.1) 1869.38,2386.11 1891.54,2408.27 ; 1891.56,2408.29 ccw(c1871.13,2428.69) 1900,2428.69 1900,2440.65 cw(c1918.79,2440.65) 1905.49,2453.92 ; 1905.5,2453.93 ccw(c1892.52,2466.89) 1910.86,2466.89 1910.86,2468.77 U10.71@1918.66,2476.57
SSRX1_N: C66.1 U10.7 | length 3063.6
  SIGNAL w5.1: U10.7@2088.51,2487.74 2095.97,2480.28 cw(c2092.53,2476.84) 2097.39,2476.84 ccw(c2102.26,2476.84) 2098.82,2473.4 2163.6,2408.62 ccw(c2177.56,2422.59) 2163.66,2408.56 ccw(c2177.56,2422.59) 2177.5,2402.84 ccw(c2177.56,2422.59) 2177.56,2402.84 2387.14,2402.84 ccw(c2387.14,2427.99) 2404.9,2410.19 cw(c2422.7,2392.42) 2422.7,2417.57 2694.41,2417.57 cw(c2694.41,2341.99) 2747.85,2395.43 2832.21,2311.07 cw(c2769.78,2248.64) 2858.07,2248.64 2858.07,1137.59 ccw(c2949.59,1137.59) 2884.85,1072.91 ; 2884.88,1072.88 2957.85,999.91 cw(c2880.22,922.28) 2990,922.28 2990,846.42 ccw(c3090,846.42) 3019.29,775.71 3037.66,757.34 cw(c3000.39,720.07) 3053.1,720.07 3053.1,693.48 ccw(c3089.75,693.48) 3062.48,668.99 ; 3060.88,670.52 ccw(c3093.93,703.58) 3062.48,668.99 ; v1@3506.07,583.33 cw(c3498.15,591.27) 3498.15,580.05 3376.87,580.05 cw(c3376.87,607.01) 3357.81,587.95 ccw(c3324.94,555.07) 3324.94,601.56 3206.03,601.56 cw(c3206.03,655.19) 3168.11,617.27 3149.34,636.04 ccw(c3099.15,585.84) 3099.15,656.83 3093.93,656.83 cw(c3093.93,703.58) 3062.48,668.99 ; v1@3506.08,583.34 cw(c3511,578.42) v1(3511,585.37)
  SIGNAL (Bottom) w5.1: C66.1@3478.27,596 3483.56,590.71 cw(c3478.72,585.87) 3485.56,585.87 3485.56,585.15 ccw(c3490.66,585.15) 3487.06,581.54 ccw(c3490.66,585.15) 3490.66,580.05 3499.03,580.05 ccw(c3499.03,589.14) 3505.44,582.7 3506.08,583.34 cw(c3511,578.42) v1(3511,585.37)
SSRX1_P: C68.1 U10.6 | length 3069.3
  SIGNAL w5.1: U10.6@2077.34,2476.57 2084.79,2469.11 ccw(c2088.24,2472.55) 2088.24,2467.68 cw(c2088.24,2462.82) 2091.68,2466.26 2109.97,2447.97 2148.47,2409.47 2156.54,2401.4 ; 2156.56,2401.37 ccw(c2177.45,2422.31) 2177.45,2392.74 2387.23,2392.74 ccw(c2387.23,2427.76) 2412,2403 cw(c2422.79,2392.2) 2422.79,2407.47 2694.33,2407.47 cw(c2694.33,2341.8) 2740.75,2388.25 2760,2369 2825,2304 cw(c2769.54,2248.54) 2825.04,2303.96 cw(c2769.54,2248.54) 2847.97,2248.54 2847.97,1137.49 ccw(c2949.34,1137.49) 2877.63,1065.85 ccw(c2949.34,1137.49) 2877.66,1065.81 2950.61,992.86 cw(c2879.9,922.15) 2979.9,922.15 2979.9,846.38 ccw(c3089.91,846.38) 3012.02,768.7 ccw(c3089.91,846.38) 3012.12,768.6 3027.56,753.16 cw(c2990.29,715.88) 3043,715.88 3043,693.42 ccw(c3089.62,693.42) 3056.61,660.5 ; 3056.64,660.47 ccw(c3089.86,693.74) 3089.86,646.73 3099,646.73 cw(c3099,585.49) 3142.3,628.79 3161.01,610.09 ; 3161.03,610.06 ccw(c3205.98,655.06) 3205.98,591.46 3324.8,591.46 cw(c3324.8,554.74) 3350.74,580.73 ; 3350.79,580.68 ccw(c3376.73,606.67) 3376.73,569.95 3498.15,569.95 cw(c3498.15,558.73) v1@3506.07,566.67 ; v1@3506.08,566.66 ccw(c3511,571.58) v1(3511,564.63)
  SIGNAL (Bottom) w5.1: C68.1@3478.27,554 3483.56,559.29 ccw(c3478.72,564.13) 3485.56,564.13 3485.56,564.85 cw(c3490.66,564.85) 3487.06,568.46 cw(c3490.66,564.85) 3490.66,569.95 3499.03,569.95 cw(c3499.03,560.86) 3505.44,567.3 3506.08,566.66 ccw(c3511,571.58) v1(3511,564.63)
SSRX2_N: C67.1 U10.16 | length 2460.1
  SIGNAL w5.1: U10.16@2188.71,2587.94 2197.59,2579.05 2197.59,2575.02 2256.67,2515.95 ccw(c2297.34,2556.61) 2256.71,2515.9 ccw(c2297.34,2556.61) 2297.34,2499.1 ccw(c2297.34,2529.23) 2318.63,2507.91 ; 2318.64,2507.93 2337.94,2527.22 cw(c2380.86,2484.3) 2380.86,2545 2793.75,2545 cw(c2793.75,2435.22) 2871.37,2512.85 3053.37,2330.85 cw(c2975.74,2253.22) 3085.52,2253.22 3085.52,2060.57 cw(c3045.28,2060.57) 3073.74,2032.12 ; 3073.72,2032.09 ccw(c3087.83,2018) 3067.88,2018 3067.88,1947.74 ccw(c3103.39,1947.74) 3078.26,1922.66 ; 3078.31,1922.6 cw(c3039.1,1883.44) 3094.51,1883.44 3094.51,1864.28 cw(c3032.32,1864.28) 3076.3,1820.3 ccw(c3105.99,1790.61) 3064,1790.61 3064,1475.42 ccw(c3164,1475.42) 3093.29,1404.71 3137.66,1360.34 ccw(c3208.37,1431.05) 3208.37,1331.05 3425,1331.05 3440,1331.05 3450,1341.05 3465,1341.05 3475,1331.05 3497,1331.05 3498.15,1331.05 ccw(c3498.15,1342.27) v1@3506.07,1334.33 ; v1@3506.08,1334.34 cw(c3511,1329.42) v1(3511,1336.37)
  SIGNAL (Bottom) w5.1: C67.1@3478.27,1347 3483.56,1341.71 cw(c3478.72,1336.87) 3485.56,1336.87 3485.56,1336.15 ccw(c3490.66,1336.15) 3487.06,1332.54 ccw(c3490.66,1336.15) 3490.66,1331.05 3499.03,1331.05 ccw(c3499.03,1340.14) 3505.44,1333.7 3506.08,1334.34 cw(c3511,1329.42) v1(3511,1336.37)
SSRX2_P: C69.1 U10.15 | length 2459.9
  SIGNAL w5.1: U10.15@2177.53,2576.76 2186.42,2567.88 2190.45,2567.88 2250.6,2507.73 ; 2250.63,2507.7 ccw(c2295.82,2552.95) 2295.82,2489 2297.44,2489 ccw(c2297.44,2528.99) 2325.71,2500.71 2345,2520 cw(c2380.97,2484.03) 2380.97,2534.9 2793.61,2534.9 cw(c2793.61,2434.9) 2864.32,2505.61 3046.13,2323.8 cw(c2975.42,2253.09) 3075.42,2253.09 3075.42,2060.67 cw(c3045.04,2060.67) 3066.54,2039.2 ccw(c3087.63,2018.08) 3057.78,2018.08 3057.78,1947.65 ccw(c3103.18,1947.65) 3071.06,1915.57 ; 3071.1,1915.53 cw(c3038.95,1883.39) 3084.41,1883.39 3084.41,1864.38 cw(c3032.06,1864.38) 3069.08,1827.36 ccw(c3105.73,1790.72) 3053.9,1790.72 3053.9,1475.38 ccw(c3163.91,1475.38) 3086.06,1397.65 ccw(c3163.91,1475.38) 3086.12,1397.6 3130.55,1353.17 ccw(c3208.33,1430.96) 3208.33,1320.95 3498.15,1320.95 cw(c3498.15,1309.73) v1@3506.07,1317.67 ; v1@3506.08,1317.66 ccw(c3511,1322.58) v1(3511,1315.63)
  SIGNAL (Bottom) w5.1: C69.1@3478.27,1305 3483.56,1310.29 ccw(c3478.72,1315.13) 3485.56,1315.13 3485.56,1315.85 cw(c3490.66,1315.85) 3487.06,1319.46 cw(c3490.66,1315.85) 3490.66,1320.95 3499.03,1320.95 cw(c3499.03,1311.86) 3505.44,1318.3 3506.08,1317.66 ccw(c3511,1322.58) v1(3511,1315.63)
SSRX3_N: J5.5 U10.29 | length 985.1
  SIGNAL w5.1: U10.29@2121.89,2768.89 U10.29@2130.24,2777.24 ; U10.29@2130.28,2777.25 ccw(c2121.02,2803.73) 2140.85,2783.9 ; 2140.88,2783.91 2199.97,2843.01 cw(c2226.9,2815.99) 2226.9,2854.14 2354.84,2854.14 cw(c2354.84,2815.99) 2381.66,2843.13 2423.05,2801.74 ccw(c2441.73,2820.42) 2441.73,2794 2465.6,2794 ccw(c2465.6,2825.18) 2487.62,2803.11 2510.82,2826.3 cw(c2569.9,2767.22) 2529.22,2840.21 cw(c2569.9,2767.22) 2569.9,2850.78 2921,2850.78 cw(c2921,2812.63) 2959.15,2812.63 2959.15,2810.55 ccw(c2987.2,2810.55) 2987.2,2782.5 J5.5@2993.5,2782.5
SSRX3_P: J5.6 U10.28 | length 987.5
  SIGNAL w5.1: U10.28@2132.99,2757.78 2141.34,2766.14 cw(c2167.83,2756.92) 2148,2776.75 2207.1,2835.86 cw(c2226.9,2815.99) 2226.9,2844.04 2354.84,2844.04 cw(c2354.84,2815.99) 2374.58,2835.92 2418.86,2791.64 ccw(c2437.54,2810.32) 2437.54,2783.9 2469.78,2783.9 ccw(c2469.78,2815.08) 2491.83,2793.03 2517.89,2819.1 cw(c2570,2766.99) 2535.25,2831.97 cw(c2570,2766.99) 2570,2840.68 2709,2840.68 2724,2840.68 2734,2830.68 2749,2830.68 2759.51,2841.19 2774.51,2841.19 2785.02,2830.68 2800.02,2830.68 2810.02,2840.68 2825.02,2840.68 2835.02,2830.68 2850.02,2830.68 2860.02,2840.68 2876,2840.68 2921,2840.68 cw(c2921,2812.63) 2949.05,2812.63 2949.05,2810.55 cw(c2921,2810.55) 2921,2782.5 J5.6@2914.7,2782.5
SSRX4_N: C92.1 U10.35 | length 2273.4
  SIGNAL w5.1: U10.35@2055.06,2835.71 2063.95,2844.59 2067.98,2844.59 2138.11,2914.72 cw(c2153.5,2899.33) 2138.17,2914.78 cw(c2153.5,2899.33) 2153.5,2921.1 3106.25,2921.1 cw(c3106.25,2815.59) 3180.79,2890.26 cw(c3106.25,2815.59) 3180.85,2890.19 3185.52,2885.53 cw(c3107.89,2807.9) 3217.67,2807.9 3217.67,2183.38 ccw(c3295.05,2183.38) 3240.3,2128.7 ccw(c3295.05,2183.38) 3240.34,2128.66 ccw(c3295.05,2183.38) 3240.38,2128.62 ccw(c3295.05,2183.38) 3295.05,2106 3377.71,2106 cw(c3377.71,2080.48) 3395.73,2098.55 ; 3395.76,2098.53 3398.72,2095.57 ccw(c3409.62,2106.47) 3409.62,2091.05 3502.79,2091.05 3508.12,2096.37 v1(3511,2096.37)
  SIGNAL (Bottom) w5.1: C92.1@3478.27,2107 3483.56,2101.71 cw(c3478.72,2096.87) 3485.56,2096.87 3485.56,2096.15 ccw(c3490.66,2096.15) 3487.06,2092.54 ccw(c3490.66,2096.15) 3490.66,2091.05 3499.03,2091.05 ccw(c3499.03,2100.14) 3505.44,2093.7 3506.08,2094.34 cw(c3511,2089.42) v1(3511,2096.37)
SSRX4_P: C93.1 U10.34 | length 2273.9
  SIGNAL w5.1: U10.34@2066.24,2824.53 2075.12,2833.42 2075.12,2837.45 2145.23,2907.56 cw(c2153.53,2899.26) 2153.53,2911 3104.35,2911 cw(c3104.35,2811) 3175.06,2881.71 3178.28,2878.48 cw(c3107.57,2807.77) 3207.57,2807.77 3207.57,2179.19 ccw(c3284.95,2179.19) 3230.2,2124.52 ccw(c3284.95,2179.19) 3230.24,2124.48 3235.48,2119.23 ccw(c3291.82,2175.57) 3291.82,2095.9 3373.53,2095.9 cw(c3373.53,2070.38) 3391.55,2088.45 ; 3391.58,2088.42 ccw(c3409.62,2106.47) 3391.63,2088.37 ccw(c3409.62,2106.47) 3409.55,2080.95 ccw(c3409.62,2106.47) 3409.62,2080.95 3411,2080.95 3435,2080.95 3445,2070.95 3460,2070.95 3470,2080.95 3485,2080.95 3502.79,2080.95 3508.12,2075.63 v1(3511,2075.63)
  SIGNAL (Bottom) w5.1: C93.1@3478.27,2065 3483.56,2070.29 ccw(c3478.72,2075.13) 3485.56,2075.13 3485.56,2075.85 cw(c3490.66,2075.85) 3487.06,2079.46 cw(c3490.66,2075.85) 3490.66,2080.95 3499.03,2080.95 cw(c3499.03,2071.86) 3505.44,2078.3 3506.08,2077.66 ccw(c3511,2082.58) v1(3511,2075.63)
SSRX_N: U9.17 U10.53 | length 483.9
  SIGNAL w5.1: U10.53@1821.03,2710.68 1827.35,2704.35 1831.31,2704.35 ; U10.53@1825.08,2710.58 1831.31,2704.35 ; 1831.31,2704.35 1840.26,2695.4 ; 1840.26,2695.4 1845.37,2690.29 cw(c1838.94,2683.87) v1@1848.03,2683.87 ; 1840.26,2695.4 1848.03,2687.63 v1@1848.03,2683.87 ; v1@1848.03,2682.98 ccw(c1854.98,2682.98) v1(1850.07,2678.07) 1848.03,2680.1 v1@1848.03,2682.98 ; v1@1848.03,2682.98 v1@1848.03,2683.87
  SIGNAL (Bottom) w5.1: v1(1850.07,2678.07) ccw(c1854.98,2682.98) 1854.98,2676.03 1855.38,2676.03 cw(c1855.38,2665.75) 1862.64,2673.02 ccw(c1869.91,2680.29) 1869.91,2670.01 1873.31,2670.01 ccw(c1873.31,2681.92) 1880.91,2672.74 ccw(c1873.31,2681.92) 1881.74,2673.5 cw(c1890.16,2665.07) 1890.16,2676.99 1911.51,2676.99 ccw(c1911.51,2684.23) 1916.63,2679.11 cw(c1921.75,2673.99) 1921.75,2681.23 2102.52,2681.23 2110.74,2689.45 U9.17@2233.4,2689.45 ; U9.17@2234.23,2689.45 cw(c2234.23,2684.63) 2237.64,2688.04 ccw(c2241.05,2691.45) 2241.05,2686.63 U9.17@2246.07,2686.63 ; U9.17@2234.82,2688.04 ccw(c2238.23,2691.45) U9.17@2238.23,2686.63
SSRX_P: U9.18 U10.52 | length 462.5
  SIGNAL w5.1: U10.52@1829.57,2724.34 1832.13,2721.78 cw(c1830.58,2720.24) 1832.76,2720.24 1832.76,2720.09 cw(c1830.93,2720.09) 1832.23,2718.79 ccw(c1832.76,2718.26) 1832.23,2717.72 1852.51,2697.44 ccw(c1858.93,2703.86) 1852.55,2697.39 1855.17,2694.77 1859.82,2694.77 cw(c1859.82,2687.82) v1(1864.74,2692.74)
  SIGNAL (Bottom) w5.1: v1(1864.74,2692.74) cw(c1859.82,2687.82) 1866.72,2688.69 cw(c1859.82,2687.82) 1866.77,2687.82 1866.77,2685.34 ccw(c1872,2685.34) 1868.31,2681.64 1868.34,2681.6 ccw(c1871.95,2685.21) 1871.95,2680.11 ccw(c1871.95,2685.21) 1875.56,2681.6 cw(c1888.8,2668.36) 1876.93,2682.84 cw(c1888.8,2668.36) 1888.8,2687.09 1907.32,2687.09 ccw(c1907.32,2694.33) 1912.45,2689.21 cw(c1917.57,2684.09) 1917.57,2691.33 2098.33,2691.33 2106.55,2699.55 2231.41,2699.55 ccw(c2231.41,2704.38) 2234.82,2700.97 cw(c2238.23,2697.56) U9.18@2238.23,2702.38 ; U9.18@2246.07,2702.38 U9.18@2241.05,2702.38 ; U9.18@2238.23,2702.38 2236.23,2702.38 2233.4,2699.55 2234.23,2699.55 ccw(c2234.23,2704.38) 2237.64,2700.97 cw(c2241.05,2697.56) U9.18@2241.05,2702.38 ; U9.18@2238.23,2702.38 U9.18@2241.05,2702.38
SSTX1_N: C99.1 U3.22 | length 2431.6
  SIGNAL w5.1: C99.1@2497.22,2387.9 2502.51,2382.61 cw(c2497.67,2377.78) 2504.51,2377.78 2504.51,2377.05 ccw(c2509.61,2377.05) 2506,2373.45 ccw(c2509.61,2377.05) 2509.61,2371.95 2676.28,2371.95 cw(c2676.28,2299.41) 2727.58,2350.71 2780.7,2297.58 cw(c2717.19,2234.07) 2807.01,2234.07 2807.01,1118.59 ccw(c2907.01,1118.59) 2836.3,1047.88 2896.57,987.6 cw(c2818.95,909.97) 2928.73,909.97 2928.73,838.98 ccw(c3028.73,838.98) 2958.02,768.27 3003.77,722.51 cw(c2962.18,680.92) 3021,680.92 3021,679.47 ccw(c3083.37,679.47) 3039.27,635.37 3044.75,629.89 ; 3044.77,629.87 ccw(c3075.62,660.76) 3075.62,617.1 ; 3075.63,617.1 cw(c3075.63,573.45) 3106.49,604.32 3150.9,559.9 ccw(c3215.72,624.72) 3215.72,533.06 3318.15,533.06 ccw(c3318.15,544.28) v1@3326.07,536.34 ; v1@3326.08,536.34 cw(c3331,531.43) v1(3331,538.38)
  SIGNAL (Bottom) w5.1: v1(3331,538.38) 3333.88,538.38 3339.21,533.06 3350.69,533.06 3353.52,535.88 U3.22@3364.11,535.88
SSTX1_P: C98.1 U3.23 | length 2435.3
  SIGNAL w5.1: C98.1@2497.22,2345.9 2502.51,2351.19 ccw(c2497.67,2356.03) 2504.51,2356.03 2504.51,2356.75 cw(c2509.61,2356.75) 2506,2360.36 cw(c2509.61,2356.75) 2509.61,2361.85 2676.19,2361.85 cw(c2676.19,2299.19) 2720.47,2343.53 ; 2720.5,2343.5 2773.5,2290.5 cw(c2716.99,2233.99) 2796.91,2233.99 2796.91,1118.55 ccw(c2906.92,1118.55) 2829.07,1040.82 ccw(c2906.92,1118.55) 2829.13,1040.76 2889.34,980.55 cw(c2818.63,909.84) 2918.63,909.84 2918.63,838.94 ccw(c3028.64,838.94) 2950.79,761.21 ccw(c3028.64,838.94) 2950.85,761.15 2976.44,735.56 2993.67,718.33 cw(c2952.08,676.74) 3010.9,676.74 ; 3010.9,680.92 3010.9,679.43 ccw(c3083.26,679.43) 3032.05,628.3 ccw(c3083.26,679.43) 3032.1,628.26 3037.66,622.7 ; 3037.69,622.66 ccw(c3075.55,660.59) 3075.55,607 cw(c3075.55,573.26) 3099.41,597.12 3143.76,552.76 ; 3143.78,552.74 ccw(c3215.72,624.72) 3215.72,522.96 3318.15,522.96 cw(c3318.15,511.74) v1@3326.07,519.68 ; v1@3326.08,519.67 ccw(c3331,524.59) v1(3331,517.63)
  SIGNAL (Bottom) w5.1: v1(3331,517.63) 3333.88,517.63 3339.21,522.96 3350.69,522.96 3353.52,520.13 U3.23@3364.11,520.13
SSTX2_N: C103.1 U4.22 | length 1911.9
  SIGNAL w5.1: C103.1@2493.72,2512 2499.01,2506.71 cw(c2494.17,2501.87) 2501.01,2501.87 2501.01,2501.15 ccw(c2506.11,2501.15) 2502.5,2497.54 ccw(c2506.11,2501.15) 2506.11,2496.05 2774.83,2496.05 cw(c2774.83,2386.39) 2852.37,2463.93 2996.9,2319.4 cw(c2919.28,2241.77) 3029.06,2241.77 3029.06,2100.74 cw(c2971.2,2100.74) 3012.11,2059.83 ccw(c3053.42,2018.52) 2995,2018.52 2995,1853.83 ccw(c3030.8,1853.83) 3005.49,1828.51 cw(c2965.91,1788.92) 3021.89,1788.92 3021.89,1440.82 ccw(c3121.89,1440.82) 3051.18,1370.11 3107.94,1313.35 ccw(c3178.65,1384.06) 3178.65,1284.06 3318.15,1284.06 ccw(c3318.15,1295.28) v1@3326.07,1287.34 ; v1@3326.08,1287.34 cw(c3331,1282.43) v1(3331,1289.38)
  SIGNAL (Bottom) w5.1: v1(3331,1289.38) 3333.88,1289.38 3339.21,1284.06 3350.69,1284.06 3353.52,1286.88 U4.22@3364.11,1286.88
SSTX2_P: C102.1 U4.23 | length 1911.9
  SIGNAL w5.1: C102.1@2493.72,2470 2499.01,2475.29 ccw(c2494.17,2480.13) 2501.01,2480.13 2501.01,2480.85 cw(c2506.11,2480.85) 2502.5,2484.46 cw(c2506.11,2480.85) 2506.11,2485.95 2774.65,2485.95 cw(c2774.65,2385.95) 2845.36,2456.66 2989.67,2312.35 cw(c2918.96,2241.64) 3018.96,2241.64 3018.96,2100.86 cw(c2970.92,2100.86) 3004.91,2066.91 ccw(c3053.14,2018.64) 2984.9,2018.64 2984.9,1853.77 ccw(c3030.66,1853.77) 2998.28,1821.44 ; 2998.31,1821.41 cw(c2965.74,1788.86) 3011.79,1788.86 3011.79,1440.78 ccw(c3121.8,1440.78) 3043.95,1363.05 ccw(c3121.8,1440.78) 3044.01,1362.99 3100.82,1306.18 ccw(c3178.61,1383.97) 3100.88,1306.12 ccw(c3178.61,1383.97) 3178.61,1273.96 3318.15,1273.96 cw(c3318.15,1262.74) v1@3326.07,1270.68 ; v1@3326.08,1270.67 ccw(c3331,1275.59) v1(3331,1268.63)
  SIGNAL (Bottom) w5.1: v1(3331,1268.63) 3333.88,1268.63 3339.21,1273.96 3350.69,1273.96 3353.52,1271.13 U4.23@3364.11,1271.13
SSTX3_N: C105.1 J5.9 | length 464.5
  SIGNAL w5.1: C105.1@2458,2735 2458,2724.69 ccw(c2486.04,2723.78) 2466.2,2703.94 ; 2466.24,2703.9 2505.78,2664.37 ccw(c2525.58,2684.24) 2525.58,2656.18 2597,2656.18 2628,2656.18 2638,2666.18 2653,2666.18 2663,2656.18 2678,2656.18 2691.72,2656.18 ccw(c2691.72,2686.28) 2713,2665 2722.81,2674.81 ccw(c2704.28,2693.33) 2730.48,2693.33 2728.28,2725.57 ccw(c2698.2,2723.5) 2725.09,2737.14 cw(c2759.06,2754.5) 2720.91,2754.47 ccw(c2692.86,2754.45) 2692.86,2782.5 J5.9@2678.5,2782.5
SSTX3_P: C104.1 J5.8 | length 464.4
  SIGNAL w5.1: C104.1@2428,2705 C104.1@2438.31,2705 ; C104.1@2438.34,2705 cw(c2439.22,2676.96) 2459.06,2696.8 ccw(c2486.04,2723.78) 2459.09,2696.76 2498.64,2657.22 ccw(c2525.58,2684.24) 2525.58,2646.09 2691.81,2646.09 ccw(c2691.81,2686.06) 2720.08,2657.79 2732.91,2670.63 ccw(c2714.38,2689.15) 2740.58,2689.15 2740.59,2694.04 ; 2740.57,2694.04 2738.36,2726.26 ccw(c2698.2,2723.5) 2734.09,2741.72 cw(c2759.06,2754.5) 2757.12,2782.49 J5.8@2757.3,2782.5
SSTX4_N: C107.1 U7.22 | length 1664.1
  SIGNAL w5.1: C107.1@2477.72,2886 2483.01,2880.71 cw(c2478.17,2875.87) 2485.01,2875.87 2485.01,2875.15 ccw(c2490.11,2875.15) 2486.5,2871.54 ccw(c2490.11,2875.15) 2490.11,2870.05 2497,2870.05 ccw(c2497,2887.25) 2509.15,2875.07 ; 2509.16,2875.09 2511.09,2877.02 cw(c2534.09,2854.02) 2511.14,2877.07 cw(c2534.09,2854.02) 2534.09,2886.54 3100.22,2886.54 cw(c3100.22,2820.09) 3147.16,2867.13 cw(c3100.22,2820.09) 3147.2,2867.08 3150.21,2864.07 cw(c3096.21,2810.07) 3172.58,2810.07 3172.58,2159.94 ccw(c3272.58,2159.94) 3201.87,2089.23 3220.26,2070.84 ; 3220.28,2070.82 ccw(c3284.92,2135.5) 3284.92,2044.06 3322.79,2044.06 3328.12,2049.38 v1(3331,2049.38)
  SIGNAL (Bottom) w5.1: v1(3331,2049.38) 3333.88,2049.38 3339.21,2044.06 3350.69,2044.06 3353.52,2046.88 U7.22@3364.11,2046.88
SSTX4_P: C106.1 U7.23 | length 1664.1
  SIGNAL w5.1: C106.1@2477.72,2844 2483.01,2849.29 ccw(c2478.17,2854.13) 2485.01,2854.13 2485.01,2854.85 cw(c2490.11,2854.85) 2486.5,2858.46 cw(c2490.11,2854.85) 2490.11,2859.95 2497.05,2859.95 ccw(c2497.05,2887.12) 2516.27,2867.91 2518.18,2869.82 cw(c2534.17,2853.83) 2534.17,2876.44 3096.03,2876.44 cw(c3096.03,2809.99) 3142.97,2857.03 cw(c3096.03,2809.99) 3143.02,2856.98 cw(c3096.03,2810) 3162.48,2810 3162.48,2159.9 ccw(c3272.49,2159.9) 3194.64,2082.17 ccw(c3272.49,2159.9) 3194.7,2082.11 3216.08,2060.74 ccw(c3280.73,2125.4) 3280.73,2033.96 3322.79,2033.96 3328.12,2028.63 v1(3331,2028.63)
  SIGNAL (Bottom) w5.1: v1(3331,2028.63) 3333.88,2028.63 3339.21,2033.96 3350.69,2033.96 3353.52,2031.13 U7.23@3364.11,2031.13
SSTX_N: C101.1 U9.21 | length 82.6
  SIGNAL (Bottom) w5.1: C101.1@2173.72,2764 2179.01,2758.71 cw(c2174.17,2753.87) 2181.01,2753.87 ccw(c2187.85,2753.87) 2183.01,2749.03 ccw(c2188.39,2754.41) 2188.39,2746.8 2231.41,2746.8 ccw(c2231.41,2751.63) 2234.82,2748.22 cw(c2238.23,2744.81) 2238.23,2749.63 U9.21@2246.07,2749.63
SSTX_P: C100.1 U9.20 | length 81.1
  SIGNAL (Bottom) w5.1: C100.1@2173.72,2722 2179.45,2727.73 ccw(c2175.67,2731.5) 2181.01,2731.5 2181.01,2731.6 cw(c2186.11,2731.6) 2182.5,2735.21 cw(c2186.11,2731.6) 2186.11,2736.7 2231.41,2736.7 cw(c2231.41,2731.88) 2234.82,2735.29 ccw(c2238.23,2738.7) 2238.23,2733.88 U9.20@2246.07,2733.88
TX1_N: C23.2 U3.33 | length 103.2
  SIGNAL (Bottom) w4.29: C23.2@3182,393.72 3177.04,398.68 ccw(c3170.44,392.08) 3170.44,401.41 cw(c3170.44,405.7) 3167.4,402.67 cw(c3170.44,405.7) 3166.15,405.7 cw(c3170.43,405.7) 3167.4,408.74 3195.31,436.65 ccw(c3174.58,457.38) 3203.9,457.38 cw(c3208.56,457.42) 3205.27,460.71 ccw(c3201.97,464.01) 3206.63,464.01 U3.33@3206.63,472.89
TX1_P: C20.2 U3.34 | length 103.4
  SIGNAL (Bottom) w4.29: C20.2@3140,393.72 3144.96,398.68 cw(c3151.56,392.08) 3151.56,401.41 ccw(c3151.56,405.7) 3154.6,402.67 ccw(c3151.57,405.7) 3155.86,405.7 3155.86,407.83 cw(c3165.29,407.83) 3156,409.5 cw(c3165.29,407.83) 3158.62,414.51 3188.01,443.9 ccw(c3174.49,457.42) 3193.61,457.42 ccw(c3188.95,457.42) 3192.25,460.71 cw(c3195.54,464.01) 3190.88,464.01 U3.34@3190.88,472.89
TX2_N: C22.2 U4.33 | length 104.2
  SIGNAL (Bottom) w4.29: C22.2@3179.12,1147.88 ccw(c3172.53,1141.27) 3172.53,1150.61 3170.44,1150.61 cw(c3170.44,1154.9) 3167.4,1151.86 cw(c3170.44,1154.9) 3166.15,1154.9 cw(c3188.53,1154.9) 3166.15,1155.21 cw(c3188.53,1154.9) 3167.78,1163.29 cw(c3188.53,1154.9) 3172.7,1170.73 3200.92,1198.95 ; C22.2@3179.13,1147.87 C22.2@3182,1145 ; 3200.93,1198.95 ccw(c3193.73,1206.14) 3203.9,1206.14 3203.9,1208.42 cw(c3208.56,1208.42) 3205.27,1211.71 ccw(c3201.97,1215.01) 3206.63,1215.01 U4.33@3206.63,1223.89
TX2_P: C19.2 U4.34 | length 104
  SIGNAL (Bottom) w4.29: C19.2@3140,1145 C19.2@3142.87,1147.87 ; C19.2@3142.88,1147.88 cw(c3149.47,1141.27) 3149.47,1150.61 3151.57,1150.61 ccw(c3151.57,1154.9) 3154.6,1151.86 ccw(c3151.56,1154.9) 3155.86,1154.9 3155.86,1154.96 cw(c3188.37,1154.96) 3155.86,1155.21 cw(c3188.37,1154.96) 3159.14,1169.2 cw(c3188.37,1154.96) 3165.38,1177.96 3192.14,1204.72 ccw(c3188.59,1208.27) 3193.61,1208.27 3193.61,1208.42 ccw(c3188.95,1208.42) 3192.25,1211.71 cw(c3195.54,1215.01) 3190.88,1215.01 U4.34@3190.88,1223.89
TX3_N: C21.2 U7.33 | length 103
  SIGNAL (Bottom) w4.29: C21.2@3182,1905 3177.04,1909.96 ccw(c3170.44,1903.36) 3170.44,1912.7 cw(c3170.44,1916.99) 3167.4,1913.95 cw(c3170.44,1916.99) 3166.15,1916.99 cw(c3170.43,1916.99) 3167.4,1920.02 3195.52,1948.14 ccw(c3175.29,1968.37) 3201.59,1957.1 ccw(c3175.29,1968.37) 3203.9,1968.37 ; 3203.9,1968.42 cw(c3208.56,1968.42) 3205.27,1971.71 ccw(c3201.97,1975.01) 3206.63,1975.01 U7.33@3206.63,1983.89
TX3_P: C18.2 U7.34 | length 103.2
  SIGNAL (Bottom) w4.29: C18.2@3140,1905 3144.96,1909.96 cw(c3151.56,1903.36) 3151.56,1912.7 ccw(c3151.56,1916.99) 3154.6,1913.95 ccw(c3151.57,1916.99) 3155.86,1916.99 3155.86,1919.12 cw(c3165.29,1919.12) 3158.62,1925.79 3188.21,1955.38 ccw(c3175.18,1968.42) 3192.73,1962.8 ccw(c3175.18,1968.42) 3193.61,1968.42 ccw(c3188.95,1968.42) 3192.25,1971.7 cw(c3195.54,1975.01) 3190.88,1975.01 U7.34@3190.88,1983.89